# EAGLE board mbhp_ainser64_v1 (EAGLE 6.1)
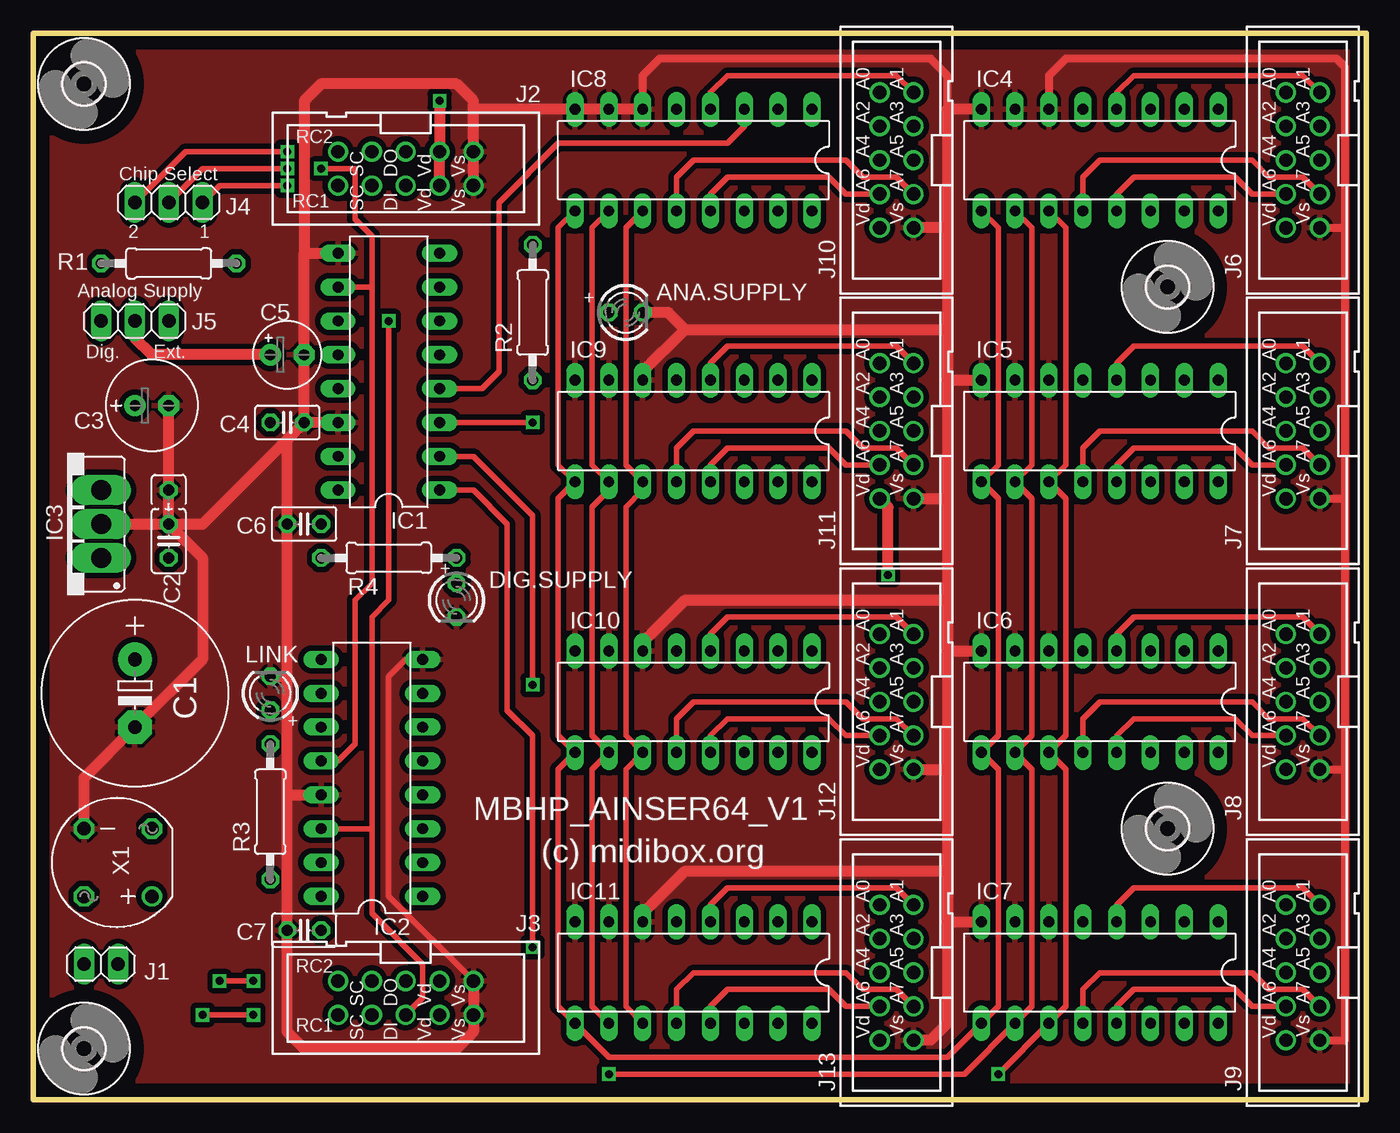
[diagram p0: board, top side]
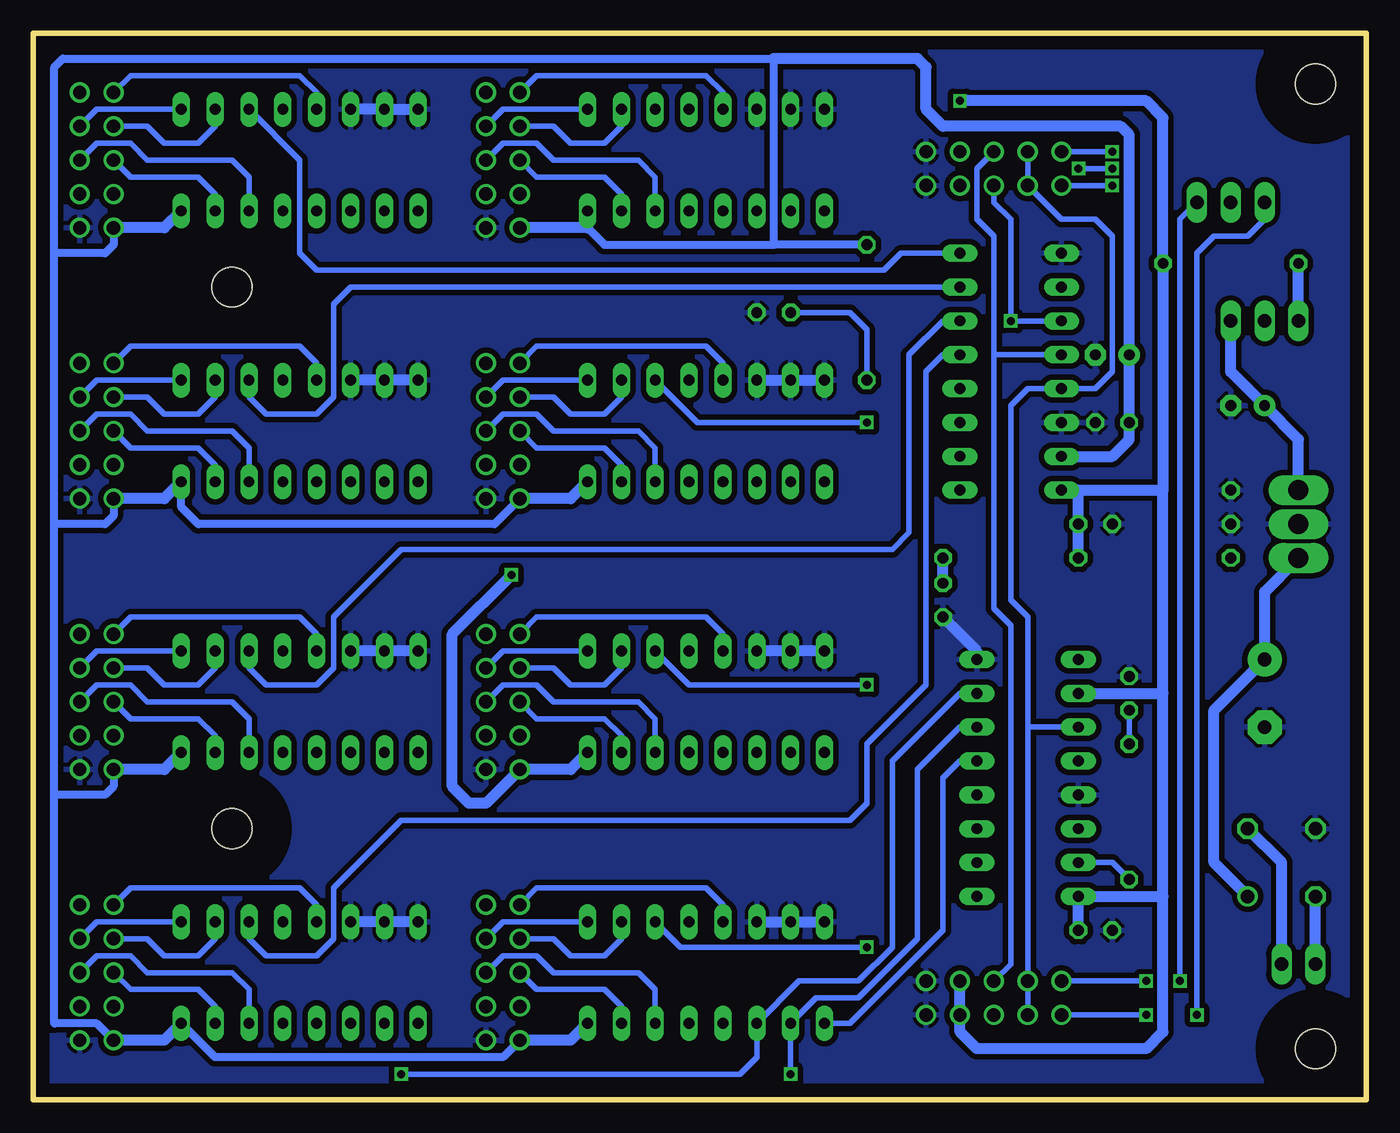
[diagram p1: board, bottom side, seen from below]

Size 100 x 80 mm. Coordinates in mm from the lower left corner, seen from the top.
Outline: 0,0 100,0 100,80 0,80 0,0
Copper layers (1*16): Top 0.035mm / dielectric 1.5mm / Bottom 0.035mm
Design rules: minimum track width 10mil, minimum drill 20mil, track to track 8mil, track to pad 8mil, pad to pad 8mil, via to via 8mil, smd to smd 8mil, copper to edge 40mil, drill to drill 8mil, minimum pad ring 10mil, minimum via ring 8mil, stop-mask expansion 4mil, vias tented up to drill 0mil, thermal gap 10mil

## Footprints (pad centres in the part's own frame; a part is rotated, then mirrored left to right if it is on the bottom)
LED3MM = drill 0.813 octagon: A -1.27,0; K 1.27,0
E5-13 = drill 1.016 pad 2.54: + -2.54,0 | drill 1.016 pad 2.54 octagon: - 2.54,0
C025_050-025X075 = drill 0.813 octagon: 1 -1.27,0; 2 1.27,0; 3 3.81,0
E2,5-7 = drill 0.813 pad 1.6: + -1.27,0 | drill 0.813 pad 1.6 octagon: - 1.27,0
C025-025X050 = drill 0.813 octagon: 1 -1.27,0; 2 1.27,0
E2,5-5 = drill 0.813 pad 1.6: + -1.27,0 | drill 0.813 pad 1.6 octagon: - 1.27,0
3,0 = hole 3: 0,0
DIL16 = drill 0.813 long: 1 -8.89,-3.81; 2 -6.35,-3.81; 3 -3.81,-3.81; 4 -1.27,-3.81; 5 1.27,-3.81; 6 3.81,-3.81; 7 6.35,-3.81; 8 8.89,-3.81; 9 8.89,3.81; 10 6.35,3.81; 11 3.81,3.81; 12 1.27,3.81; 13 -1.27,3.81; 14 -3.81,3.81; 15 -6.35,3.81; 16 -8.89,3.81
78XXS_ = drill 1.499 pad 1.93 long: GND 0,-2.54; IN -2.54,-2.54; OUT 2.54,-2.54
1X02 = drill 1.016 long: 1 -1.27,0; 2 1.27,0
PAK100/2500-10 = drill 1 pad 1.422: 1 -5.08,-1.27; 2 -5.08,1.27; 3 -2.54,-1.27; 4 -2.54,1.27; 5 0,-1.27; 6 0,1.27; 7 2.54,-1.27; 8 2.54,1.27; 9 5.08,-1.27; 10 5.08,1.27
1X03 = drill 1.016 long: 1 -2.54,0; 2 0,0; 3 2.54,0
0207/10 = drill 0.813 octagon: 1 -5.08,0; 2 5.08,0
RB1A = drill 1.016: + -2.54,2.54 | drill 1.016 octagon: - 2.54,-2.54; AC1 2.54,2.54; AC2 -2.54,-2.54

## Placement (x,y rotation side)
ANA.SUPPLY  [LED3MM]  44.45,59.05 0 top
C1  470uF  [E5-13]  7.62,30.48 270 top
C2  330nF  [C025_050-025X075]  10.16,41.91 90 top
C3  47uF  [E2,5-7]  8.89,52.07 0 top
C4  100nF  [C025-025X050]  19.05,50.8 180 top
C5  10uF  [E2,5-5]  19.05,55.88 0 top
C6  100nF  [C025-025X050]  20.32,43.18 180 top
C7  100nF  [C025-025X050]  20.32,12.7 180 top
DIG.SUPPLY  [LED3MM]  31.75,37.47 270 top
E$5  [3,0]  3.81,3.81 0 top
E$6  [3,0]  3.81,76.2 0 top
E$7  [3,0]  85.09,60.96 0 top
E$8  [3,0]  85.09,20.32 0 top
IC1  MCP3208  [DIL16]  26.67,54.61 90 top
IC2  74HC595  [DIL16]  25.4,24.13 90 top
IC3  7805  [78XXS_]  2.54,43.18 90 top
IC4  4051  [DIL16]  80.01,70.48 180 top
IC5  4051  [DIL16]  80.01,50.16 180 top
IC6  4051  [DIL16]  80.01,29.84 180 top
IC7  4051  [DIL16]  80.01,9.53 180 top
IC8  4051  [DIL16]  49.53,70.48 180 top
IC9  4051  [DIL16]  49.53,50.16 180 top
IC10  4051  [DIL16]  49.53,29.84 180 top
IC11  4051  [DIL16]  49.53,9.53 180 top
J1  [1X02]  5.08,10.16 180 top
J2  [PAK100/2500-10]  27.94,69.85 180 top
J3  [PAK100/2500-10]  27.94,7.62 180 top
J4  [1X03]  10.16,67.31 180 top
J5  [1X03]  7.62,58.42 180 top
J6  [PAK100/2500-10]  95.25,70.48 90 top
J7  [PAK100/2500-10]  95.25,50.16 90 top
J8  [PAK100/2500-10]  95.25,29.84 90 top
J9  [PAK100/2500-10]  95.25,9.53 90 top
J10  [PAK100/2500-10]  64.77,70.48 90 top
J11  [PAK100/2500-10]  64.77,50.16 90 top
J12  [PAK100/2500-10]  64.77,29.84 90 top
J13  [PAK100/2500-10]  64.77,9.53 90 top
LINK  [LED3MM]  17.78,30.48 90 top
R1  10  [0207/10]  10.16,62.74 0 top
R2  470  [0207/10]  37.47,59.05 90 top
R3  470  [0207/10]  17.78,21.59 90 top
R4  470  [0207/10]  26.67,40.64 180 top
X1  B40C800  [RB1A]  6.35,17.78 180 top

## Library data of the parts
ANA.SUPPLY DIG.SUPPLY LINK = led
C1-C7 R1-R4 = rcl
E$5-E$8 = holes
IC1 IC2 IC4-IC11 = 40xx
IC3 = v-reg
J1 J4 J5 = pinhead
J2 J3 J6-J13 = con-3m
X1 = rectifier

## Nets
CH0: IC1.1 IC11.3
CH1: IC1.2 IC10.3
CH2: IC1.3 IC9.3
CH3: IC1.4 IC8.3
CH4: IC1.5 IC7.3
CH5: IC1.6 IC6.3
CH6: IC1.7 IC5.3
CH7: IC1.8 IC4.3
CS: IC1.10 IC2.12 J4.2
DI: IC1.11 IC2.14 J2.6 J3.6
DO: IC1.12 J2.5 J3.5
GND: ANA.SUPPLY.K C1.- C2.2 C2.3 C3.- C4.1 C5.- C6.2 C7.2 DIG.SUPPLY.K IC1.9 IC1.14 IC2.8 IC2.13 IC3.GND IC4.6 IC4.7 IC4.8 IC5.6 IC5.7 IC5.8 IC6.6 IC6.7 IC6.8 IC7.6 IC7.7 IC7.8 IC8.6 IC8.7 IC8.8 IC9.6 IC9.7 IC9.8 IC10.6 IC10.7 IC10.8 IC11.6 IC11.7 IC11.8 J2.1 J2.2 J3.1 J3.2 J6.1 J7.1 J8.1 J9.1 J10.1 J11.1 J12.1 J13.1 LINK.K X1.-
MUXA: IC2.5 IC4.9 IC5.9 IC6.9 IC7.9 IC8.9 IC9.9 IC10.9 IC11.9
MUXB: IC2.6 IC4.10 IC5.10 IC6.10 IC7.10 IC8.10 IC9.10 IC10.10 IC11.10
MUXC: IC2.7 IC4.11 IC5.11 IC6.11 IC7.11 IC8.11 IC9.11 IC10.11 IC11.11
RC1: J2.9 J3.10 J4.3
RC2: J2.10 J3.9 J4.1
S$1: IC4.5 J6.10
S$2: IC4.4 J6.9
S$3: IC4.2 J6.8
S$4: IC4.1 J6.7
S$5: IC4.15 J6.6
S$6: IC4.14 J6.5
S$7: IC4.13 J6.4
S$8: IC4.12 J6.3
S$9: J1.2 X1.AC1
S$11: IC5.5 J7.10
S$12: IC5.4 J7.9
S$13: IC5.2 J7.8
S$14: IC5.1 J7.7
S$15: IC5.15 J7.6
S$16: IC5.14 J7.5
S$17: IC5.13 J7.4
S$18: J1.1 X1.AC2
S$19: IC5.12 J7.3
S$21: IC6.5 J8.10
S$22: IC6.4 J8.9
S$23: IC6.2 J8.8
S$24: IC6.1 J8.7
S$25: IC6.15 J8.6
S$26: IC6.14 J8.5
S$27: C3.+ IC3.OUT J5.1
S$28: IC6.13 J8.4
S$29: IC6.12 J8.3
S$31: IC7.5 J9.10
S$32: IC7.4 J9.9
S$33: IC7.2 J9.8
S$34: IC7.1 J9.7
S$35: IC7.15 J9.6
S$36: C1.+ IC3.IN X1.+
S$37: IC7.14 J9.5
S$38: IC7.13 J9.4
S$39: IC7.12 J9.3
S$41: IC8.5 J10.10
S$42: IC8.4 J10.9
S$43: IC8.2 J10.8
S$44: IC8.1 J10.7
S$45: IC2.15 R3.1
S$46: IC8.15 J10.6
S$47: IC8.14 J10.5
S$48: IC8.13 J10.4
S$49: IC8.12 J10.3
S$51: IC9.5 J11.10
S$52: IC9.4 J11.9
S$53: IC9.2 J11.8
S$54: J5.3 R1.1
S$55: IC9.1 J11.7
S$56: IC9.15 J11.6
S$57: IC9.14 J11.5
S$58: IC9.13 J11.4
S$59: IC9.12 J11.3
S$61: IC10.5 J12.10
S$62: IC10.4 J12.9
S$63: LINK.A R3.2
S$64: IC10.2 J12.8
S$65: IC10.1 J12.7
S$66: IC10.15 J12.6
S$67: IC10.14 J12.5
S$68: IC10.13 J12.4
S$69: IC10.12 J12.3
S$71: IC11.5 J13.10
S$72: ANA.SUPPLY.A R2.1
S$73: DIG.SUPPLY.A R4.1
S$74: IC11.4 J13.9
S$75: IC11.2 J13.8
S$76: IC11.1 J13.7
S$77: IC11.15 J13.6
S$79: IC11.14 J13.5
S$80: IC11.13 J13.4
S$81: IC11.12 J13.3
SC: IC1.13 IC2.11 J2.7 J2.8 J3.7 J3.8
VCA: C4.2 C5.+ IC1.15 IC4.16 IC5.16 IC6.16 IC7.16 IC8.16 IC9.16 IC10.16 IC11.16 J5.2 J6.2 J7.2 J8.2 J9.2 J10.2 J11.2 J12.2 J13.2 R2.2
VCC: C6.1 C7.1 IC1.16 IC2.10 IC2.16 J2.3 J2.4 J3.3 J3.4 R1.2 R4.2

## Tracks (layer width: path | path; a pad name or v marks a point on that pad's centre or on a via)
CH0  (via drill 0.6)
  Top 0.406: IC1.1 33.02,45.72 35.56,43.18 35.56,29.21 37.47,27.3 v37.47,11.43
  Bottom 0.406: IC11.3 51.44,11.43 v37.47,11.43
CH1  (via drill 0.6)
  Top 0.406: IC1.2 33.02,48.26 37.47,43.81 v37.47,31.11
  Bottom 0.406: v37.47,31.11 50.8,31.11 IC10.3
CH2  (via drill 0.6)
  Top 0.406: IC1.3 v37.47,50.8
  Bottom 0.406: v37.47,50.8 50.16,50.8 IC9.3
CH3
  Top 0.406: IC1.4 33.66,53.34 34.92,54.61 34.92,67.31 39.37,71.75 52.07,71.75 53.34,73.03 IC8.3
CH4
  Bottom 0.406: IC7.3 83.82,12.06 82.55,10.79 78.74,10.79 77.47,12.06 77.47,15.88 72.39,20.95 38.73,20.95 37.47,22.23 37.47,26.67 33.02,31.11 33.02,54.61 31.75,55.88 IC1.5
CH5
  Bottom 0.406: IC6.3 83.82,32.38 82.55,31.11 78.74,31.11 77.47,32.38 77.47,36.2 72.39,41.27 35.56,41.27 34.29,42.55 34.29,55.88 31.75,58.42 IC1.6
CH6
  Bottom 0.406: IC1.7 76.2,60.96 77.47,59.69 77.47,52.7 78.74,51.44 82.55,51.44 83.82,52.7 IC5.3
CH7
  Bottom 0.406: IC1.8 34.92,63.5 36.2,62.23 78.74,62.23 80.01,63.5 80.01,70.48 IC4.3
CS  (via drill 0.6)
  Top 0.406: 25.4,60.96 25.4,64.77 24.13,66.04 24.13,69.85 v21.59,69.85 | IC1.10 25.4,60.96 | 25.4,60.96 25.4,38.73 24.13,37.47 24.13,26.67 22.86,25.4 IC2.12 | v19.05,69.85 12.7,69.85 J4.2
  Bottom 0.406: v21.59,69.85 v19.05,69.85
DI  (via drill 0.6)
  Top 0.406: IC2.14 25.4,20.32 | 25.4,20.32 25.4,13.97 29.21,10.16 29.21,7.62 J3.6 | v26.67,58.42 26.67,37.47 25.4,36.2 25.4,20.32
  Bottom 0.406: IC1.11 v26.67,58.42 26.67,66.04 27.94,67.31 J2.6
DO
  Bottom 0.406: J2.5 29.21,69.85 29.21,66.04 27.94,64.77 27.94,55.88 | IC1.12 27.94,55.88 | 27.94,55.88 27.94,36.83 26.67,35.56 26.67,10.16 J3.5
GND
  Top 0.406: IC2.8 27.94,33.02 26.67,31.75 26.67,15.24 J3.1
  Top 0.61: J7.1 98.42,45.09 | 98.42,45.09 98.42,65.41 | J8.1 98.42,24.77 | 98.42,24.77 98.42,45.09 | J9.1 98.42,4.45 98.42,24.77 | J6.1 98.42,65.41 | 98.42,65.41 98.42,77.47 97.79,78.11 77.47,78.11 76.2,76.83 IC4.6 | 68.58,74.3 68.58,76.83 67.31,78.11 46.99,78.11 45.72,76.83 IC8.6
  Top 0.813: 20.32,63.5 20.32,74.93 21.59,76.2 31.75,76.2 33.02,74.93 33.02,74.3 | J3.2 J3.1 33.02,5.08 31.75,3.81 20.32,3.81 19.05,5.08 C7.2 19.05,22.86 | X1.- 3.81,24.13 C1.- 12.7,33.02 12.7,40.64 C2.2 | IC3.GND C2.2 | C2.2 C2.3 C3.- | IC1.14 C4.1 | C4.1 C5.- 20.32,63.5 | 20.32,63.5 IC1.9 | 19.05,22.86 19.05,31.75 | 19.05,31.75 C6.2 19.05,49.53 | C2.2 12.7,43.18 19.05,49.53 | 19.05,49.53 C4.1 | 19.05,22.86 IC2.13 | LINK.K 19.05,31.75 | IC4.8 68.58,74.3 68.58,65.41 | 68.58,65.41 J10.1 | 68.58,65.41 68.58,57.78 | 68.58,57.78 68.58,53.98 | 68.58,53.98 IC5.8 | 68.58,53.98 68.58,45.09 | J11.1 68.58,45.09 | 68.58,45.09 68.58,37.47 | 68.58,37.47 68.58,33.66 | 68.58,33.66 IC6.8 | 68.58,33.66 68.58,24.77 | J12.1 68.58,24.77 | 68.58,24.77 68.58,17.14 | 68.58,17.14 68.58,13.34 | 68.58,13.34 IC7.8 | 68.58,13.34 68.58,5.71 67.31,4.45 J13.1 | J2.2 J2.1 33.02,74.3 | IC8.6 IC8.7 IC8.8 33.02,74.3 | IC10.6 45.72,34.29 48.9,37.47 68.58,37.47 | IC9.6 45.72,54.61 48.9,57.78 | 48.9,57.78 68.58,57.78 | IC11.6 45.72,13.97 48.9,17.14 68.58,17.14 | 48.9,57.78 47.62,59.05 ANA.SUPPLY.K
  Bottom 0.813: IC4.8 IC4.7 IC4.6 | IC5.8 IC5.7 IC5.6 | IC6.8 IC6.7 IC6.6 | IC7.8 IC7.7 IC7.6 | IC9.6 IC9.7 IC9.8 | IC10.8 IC10.7 IC10.6 | IC11.6 IC11.7 IC11.8 | IC2.8 29.21,33.66 DIG.SUPPLY.K
  pour Bottom (isolate 0.406): 0,80.01 99.69,80.01 99.69,0 0,0
  pour Top (isolate 0.406): 0,80.01 99.69,80.01 99.69,0 0,0
MUXA
  Top 0.406: IC4.9 72.39,65.41 72.39,47.62 IC5.9 72.39,45.09 72.39,27.3 IC6.9 72.39,24.77 72.39,6.99 IC7.9 68.58,3.17 43.18,3.17 IC11.9 39.37,6.99 39.37,24.77 IC10.9 39.37,27.3 39.37,45.09 IC9.9 39.37,47.62 39.37,65.41 IC8.9
  Bottom 0.406: IC2.5 30.48,25.4 31.75,24.13 31.75,12.7 38.73,5.71 IC11.9
MUXB  (via drill 0.6)
  Top 0.406: IC4.10 74.93,65.41 74.93,47.62 IC5.10 74.93,45.09 74.93,27.3 IC6.10 74.93,24.77 74.93,6.99 IC7.10 69.85,1.91 v43.18,1.91 | IC8.10 41.91,65.41 41.91,47.62 IC9.10 43.18,45.72 41.91,44.45 41.91,27.3 IC10.10 41.91,24.77 41.91,6.99 IC11.10
  Bottom 0.406: v43.18,1.91 IC11.10 41.27,7.62 38.1,7.62 33.66,12.06 33.66,24.77 30.48,27.94 IC2.6
MUXC  (via drill 0.6)
  Top 0.406: IC4.11 77.47,65.41 77.47,47.62 IC5.11 77.47,45.09 77.47,27.3 IC6.11 77.47,24.77 77.47,6.99 IC7.11 v72.39,1.91 | IC8.11 44.45,65.41 44.45,47.62 IC9.11 45.72,45.72 44.45,44.45 44.45,27.3 IC10.11 44.45,24.77 44.45,6.99 IC11.11
  Bottom 0.406: v72.39,1.91 46.99,1.91 45.72,3.17 IC11.11 42.55,8.89 38.1,8.89 35.56,11.43 35.56,25.4 30.48,30.48 IC2.7
RC1  (via drill 0.6)
  Top 0.406: v16.51,6.35 v12.7,6.35 | v19.05,71.12 11.43,71.12 J4.3
  Bottom 0.406: J2.9 v19.05,71.12 | J3.10 v16.51,6.35 | v12.7,6.35 12.7,63.5 11.43,64.77 8.89,64.77 7.62,66.04 J4.3
RC2  (via drill 0.6)
  Top 0.406: v16.51,8.89 v13.97,8.89 | v19.05,68.58 13.97,68.58 J4.1
  Bottom 0.406: J2.10 v19.05,68.58 | J3.9 v16.51,8.89 | v13.97,8.89 13.97,66.04 J4.1
S$1
  Bottom 0.406: IC4.5 78.74,75.56 80.01,76.83 92.71,76.83 J6.10
S$2
  Top 0.406: IC4.4 81.28,75.56 82.55,76.83 95.25,76.83 J6.9
S$3
  Bottom 0.406: IC4.2 86.36,73.03 87.63,71.75 90.17,71.75 91.44,73.03 J6.8
S$4
  Bottom 0.406: IC4.1 95.25,74.3 J6.7
S$5
  Bottom 0.406: IC4.15 86.36,67.94 87.63,69.22 92.71,69.22 J6.6
S$6
  Bottom 0.406: IC4.14 83.82,69.22 85.09,70.48 91.44,70.48 92.71,71.75 95.25,71.75 J6.5
S$7
  Top 0.406: IC4.13 81.28,67.94 82.55,69.22 90.17,69.22 91.44,67.94 J6.4
S$8
  Top 0.406: IC4.12 78.74,69.22 80.01,70.48 91.44,70.48 92.71,69.22 95.25,69.22 J6.3
S$9
  Bottom 0.813: J1.2 X1.AC1
S$11
  Bottom 0.406: IC5.5 78.74,55.24 80.01,56.52 92.71,56.52 J7.10
S$12
  Top 0.406: IC5.4 81.28,55.24 82.55,56.52 95.25,56.52 J7.9
S$13
  Bottom 0.406: IC5.2 86.36,52.7 87.63,51.44 90.17,51.44 91.44,52.7 J7.8
S$14
  Bottom 0.406: IC5.1 95.25,53.98 J7.7
S$15
  Bottom 0.406: IC5.15 86.36,47.62 87.63,48.9 92.71,48.9 J7.6
S$16
  Bottom 0.406: IC5.14 83.82,48.9 85.09,50.16 91.44,50.16 92.71,51.44 95.25,51.44 J7.5
S$17
  Top 0.406: IC5.13 81.28,47.62 82.55,48.9 90.17,48.9 91.44,47.62 J7.4
S$18
  Bottom 0.813: J1.1 6.35,17.78 X1.AC2
S$19
  Top 0.406: IC5.12 78.74,48.9 80.01,50.16 91.44,50.16 92.71,48.9 95.25,48.9 J7.3
S$21
  Bottom 0.406: IC6.5 78.74,34.92 80.01,36.2 92.71,36.2 J8.10
S$22
  Top 0.406: IC6.4 81.28,34.92 82.55,36.2 95.25,36.2 J8.9
S$23
  Bottom 0.406: IC6.2 86.36,32.38 87.63,31.11 90.17,31.11 91.44,32.38 J8.8
S$24
  Bottom 0.406: IC6.1 95.25,33.66 J8.7
S$25
  Bottom 0.406: IC6.15 86.36,27.3 87.63,28.57 92.71,28.57 J8.6
S$26
  Bottom 0.406: IC6.14 83.82,28.57 85.09,29.84 91.44,29.84 92.71,31.11 95.25,31.11 J8.5
S$27
  Bottom 0.813: IC3.OUT 5.08,49.53 C3.+ 10.16,54.61 J5.1
S$28
  Top 0.406: IC6.13 81.28,27.3 82.55,28.57 90.17,28.57 91.44,27.3 J8.4
S$29
  Top 0.406: IC6.12 78.74,28.57 80.01,29.84 91.44,29.84 92.71,28.57 95.25,28.57 J8.3
S$31
  Bottom 0.406: IC7.5 78.74,14.61 80.01,15.88 92.71,15.88 J9.10
S$32
  Top 0.406: IC7.4 81.28,14.61 82.55,15.88 95.25,15.88 J9.9
S$33
  Bottom 0.406: IC7.2 86.36,12.06 87.63,10.79 90.17,10.79 91.44,12.06 J9.8
S$34
  Bottom 0.406: IC7.1 95.25,13.34 J9.7
S$35
  Bottom 0.406: IC7.15 86.36,6.99 87.63,8.26 92.71,8.26 J9.6
S$36
  Bottom 0.813: X1.+ 11.43,17.78 11.43,29.21 C1.+ 7.62,38.1 IC3.IN
S$37
  Bottom 0.406: IC7.14 83.82,8.26 85.09,9.53 91.44,9.53 92.71,10.79 95.25,10.79 J9.5
S$38
  Top 0.406: IC7.13 81.28,6.99 82.55,8.26 90.17,8.26 91.44,6.99 J9.4
S$39
  Top 0.406: IC7.12 78.74,8.26 80.01,9.53 91.44,9.53 92.71,8.26 95.25,8.26 J9.3
S$41
  Bottom 0.406: IC8.5 48.26,75.56 49.53,76.83 62.23,76.83 J10.10
S$42
  Top 0.406: IC8.4 50.8,75.56 52.07,76.83 64.77,76.83 J10.9
S$43
  Bottom 0.406: IC8.2 55.88,73.03 57.15,71.75 59.69,71.75 60.96,73.03 J10.8
S$44
  Bottom 0.406: IC8.1 64.77,74.3 J10.7
S$45
  Bottom 0.406: IC2.15 19.05,17.78 R3.1
S$46
  Bottom 0.406: IC8.15 55.88,67.94 57.15,69.22 62.23,69.22 J10.6
S$47
  Bottom 0.406: IC8.14 53.34,69.22 54.61,70.48 60.96,70.48 62.23,71.75 64.77,71.75 J10.5
S$48
  Top 0.406: IC8.13 50.8,67.94 52.07,69.22 59.69,69.22 60.96,67.94 J10.4
S$49
  Top 0.406: IC8.12 48.26,69.22 49.53,70.48 60.96,70.48 62.23,69.22 64.77,69.22 J10.3
S$51
  Bottom 0.406: IC9.5 48.26,55.24 49.53,56.52 62.23,56.52 J11.10
S$52
  Top 0.406: IC9.4 50.8,55.24 52.07,56.52 64.77,56.52 J11.9
S$53
  Bottom 0.406: IC9.2 55.88,52.7 57.15,51.44 59.69,51.44 60.96,52.7 J11.8
S$54
  Bottom 0.813: J5.3 R1.1
S$55
  Bottom 0.406: IC9.1 64.77,53.98 J11.7
S$56
  Bottom 0.406: IC9.15 55.88,47.62 57.15,48.9 62.23,48.9 J11.6
S$57
  Bottom 0.406: IC9.14 53.34,48.9 54.61,50.16 60.96,50.16 62.23,51.44 64.77,51.44 J11.5
S$58
  Top 0.406: IC9.13 50.8,47.62 52.07,48.9 59.69,48.9 60.96,47.62 J11.4
S$59
  Top 0.406: IC9.12 48.26,48.9 49.53,50.16 60.96,50.16 62.23,48.9 64.77,48.9 J11.3
S$61
  Bottom 0.406: IC10.5 48.26,34.92 49.53,36.2 62.23,36.2 J12.10
S$62
  Top 0.406: IC10.4 50.8,34.92 52.07,36.2 64.77,36.2 J12.9
S$63
  Bottom 0.406: R3.2 LINK.A
S$64
  Bottom 0.406: IC10.2 55.88,32.38 57.15,31.11 59.69,31.11 60.96,32.38 J12.8
S$65
  Bottom 0.406: IC10.1 64.77,33.66 J12.7
S$66
  Bottom 0.406: IC10.15 55.88,27.3 57.15,28.57 62.23,28.57 J12.6
S$67
  Bottom 0.406: IC10.14 53.34,28.57 54.61,29.84 60.96,29.84 62.23,31.11 64.77,31.11 J12.5
S$68
  Top 0.406: IC10.13 50.8,27.3 52.07,28.57 59.69,28.57 60.96,27.3 J12.4
S$69
  Top 0.406: IC10.12 48.26,28.57 49.53,29.84 60.96,29.84 62.23,28.57 64.77,28.57 J12.3
S$71
  Bottom 0.406: IC11.5 48.26,14.61 49.53,15.88 62.23,15.88 J13.10
S$72
  Bottom 0.406: R2.1 37.47,57.78 38.73,59.05 ANA.SUPPLY.A
S$73
  Bottom 0.813: DIG.SUPPLY.A R4.1
S$74
  Top 0.406: IC11.4 50.8,14.61 52.07,15.88 64.77,15.88 J13.9
S$75
  Bottom 0.406: IC11.2 55.88,12.06 57.15,10.79 59.69,10.79 60.96,12.06 J13.8
S$76
  Bottom 0.406: IC11.1 64.77,13.34 J13.7
S$77
  Bottom 0.406: IC11.15 55.88,6.99 57.15,8.26 62.23,8.26 J13.6
S$79
  Bottom 0.406: IC11.14 53.34,8.26 54.61,9.53 60.96,9.53 62.23,10.79 64.77,10.79 J13.5
S$80
  Top 0.406: IC11.13 50.8,6.99 52.07,8.26 59.69,8.26 60.96,6.99 J13.4
S$81
  Top 0.406: IC11.12 48.26,8.26 49.53,9.53 60.96,9.53 62.23,8.26 64.77,8.26 J13.3
SC
  Bottom 0.406: J2.7 J2.8 22.86,66.04 20.32,66.04 19.05,64.77 19.05,54.61 20.32,53.34 IC1.13 25.4,53.34 26.67,52.07 26.67,37.47 25.4,36.2 25.4,27.94 | J3.8 J3.7 25.4,27.94 | IC2.11 25.4,27.94
VCA  (via drill 0.6)
  Top 0.813: v64.14,39.37 64.14,44.45 J11.2 | C5.+ 8.89,55.88 7.62,57.15 J5.2
  Bottom 0.61: J9.2 95.25,5.71 98.42,5.71 98.42,22.86 | 98.42,22.86 98.42,43.18 | 98.42,43.18 98.42,63.5 | 98.42,63.5 98.42,77.47 97.79,78.11 44.45,78.11 | 44.45,78.11 38.1,78.11 | J6.2 93.98,64.14 94.61,63.5 98.42,63.5 | J7.2 93.98,43.81 94.61,43.18 98.42,43.18 | J8.2 93.98,23.5 94.61,22.86 98.42,22.86 | J13.2 64.77,3.17 86.36,3.17 IC7.16 | 58.42,65.41 57.15,64.14 44.45,64.14 | 44.45,64.14 44.45,78.11 | J11.2 65.41,43.18 87.63,43.18 88.9,44.45 IC5.16 | R2.2 44.45,64.14
  Bottom 0.813: IC1.15 19.05,48.26 17.78,49.53 C4.2 C5.+ 17.78,72.39 18.41,73.03 31.75,73.03 33.02,74.3 33.02,77.47 33.66,78.11 44.45,78.11 | IC7.16 90.17,4.45 J9.2 | IC6.16 90.17,24.77 J8.2 | IC5.16 90.17,45.09 J7.2 | IC4.16 90.17,65.41 J6.2 | IC11.16 59.69,4.45 J13.2 | IC10.16 59.69,24.77 J12.2 66.04,22.23 67.31,22.23 68.58,23.5 68.58,34.92 v64.14,39.37 | IC9.16 59.69,45.09 J11.2 | IC8.16 58.42,65.41 J10.2
VCC  (via drill 0.6)
  Top 0.813: v30.48,74.93 J2.3 J2.4
  Bottom 0.406: IC2.16 20.32,15.24
  Bottom 0.813: J3.3 J3.4 30.48,5.08 29.21,3.81 16.51,3.81 15.24,5.08 15.24,15.24 | 15.24,15.24 15.24,30.48 | 15.24,30.48 15.24,45.72 | 21.59,45.72 15.24,45.72 | IC2.10 15.24,30.48 | 15.24,15.24 IC2.16 C7.1 | v30.48,74.93 16.51,74.93 15.24,73.66 R1.2 15.24,45.72 | 21.59,45.72 C6.1 R4.2 | 21.59,45.72 IC1.16

## Text on the board
tNames: A0 | A1 | A0 | A1 | A2 | A3 | A2 | A3 | RC2 | A4 | A5 | A4 | A5 | Chip Select | A6 | A7 | A6 | A7 | SC | DO | Vd | Vs | RC1 | SC | DI | Vd | Vs | Vd | Vs | Vd | Vs | 2 | 1 | Analog Supply | + | A0 | A1 | A0 | A1 | Dig. | Ext. | A2 | A3 | A2 | A3 | A4 | A5 | A4 | A5 | A6 | A7 | A6 | A7 | Vd | Vs | Vd | Vs | + | A0 | A1 | A0 | A1 | A2 | A3 | A2 | A3 | A4 | A5 | A4 | A5 | A6 | A7 | A6 | A7 | + | Vd | Vs | Vd | Vs | MBHP_AINSER64_V1 | (c) midibox.org | A0 | A1 | A0 | A1 | A2 | A3 | A2 | A3 | A4 | A5 | A4 | A5 | RC2 | A6 | A7 | A6 | A7 | SC | DO | Vd | Vs | Vd | Vs | Vd | Vs | RC1 | SC | DI | Vd | Vs